# Altium PCB LF-ESP-V2.PcbDoc
Units mm, origin at the board's own origin, x right, y up, seen from the top; angles counter-clockwise.
Board outline 150 x 40.78 mm, 2 copper layers (Top Layer, Bottom Layer); 97 components, 72 nets, 451 pads, 131 vias.
Unrouted connection lines stored in the file: 246.
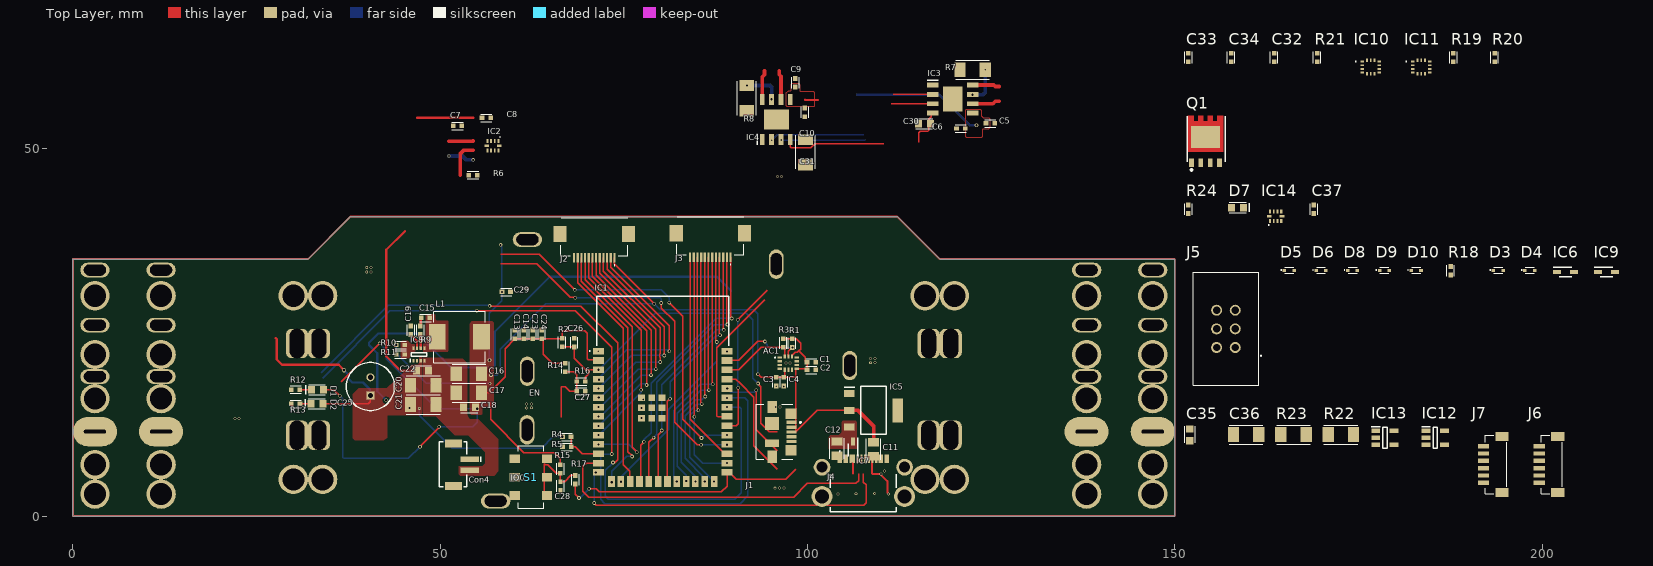
[diagram p0: Top Layer view]
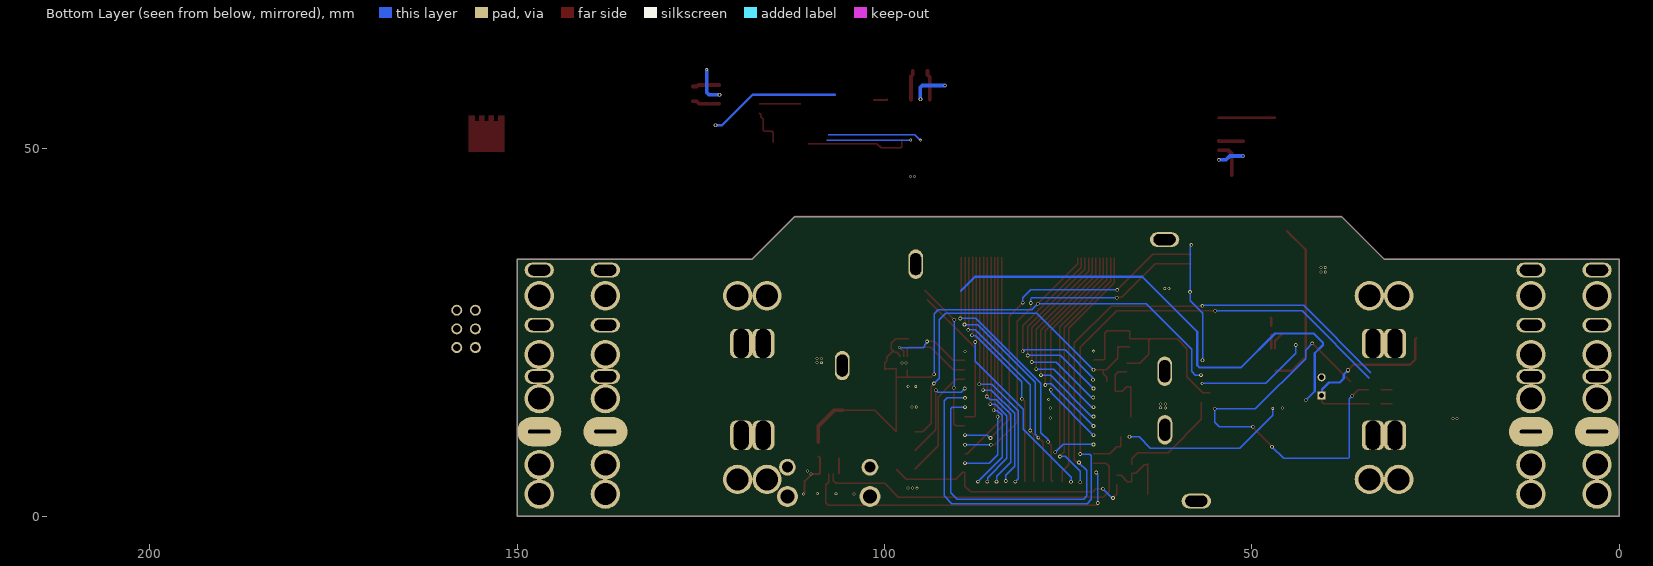
[diagram p1: Bottom Layer view, seen from below]

## Layer stack, top to bottom
Top Solder: solder mask 0.0102, Solder Resist, Dk 3.5
Top Layer: signal copper 0.0356
Dielectric 1: dielectric 0.32, FR-4, Dk 4.8
Bottom Layer: signal copper 0.0356
Bottom Solder: solder mask 0.0102, Solder Resist, Dk 3.5

## Board outline
32,35 37.775,40.775 112.225,40.775 118,35 150,35 150,0 0,0 0,35

## Design rules (kind name [scope] priority, off if disabled: settings)
BoardOutlineClearance [All] p1: gap=0.8 ignorepadtopadclearanceinfootprint=FALSE
Clearance [All] p1: gap=0.127 ignorepadtopadclearanceinfootprint=TRUE except(0.2: Arc-THPad Track-THPad SMDPad-THPad; 0.254: THPad-Fill THPad-Poly THPad-Region Via-Fill Via-Poly Via-Region; 0.33: Arc-Hole Track-Hole SMDPad-Hole THPad-Hole Via-Hole Fill-Hole Poly-Hole Region-Hole; 0.5: THPad-THPad)
HoleSize [All] p1: absolutevalues=TRUE maxlimit=4 minlimit=0.02 maxpercent=80.000 minpercent=20.000
HoleToHoleClearance [All] p1: gap=0.127 allowstackedmicrovias=TRUE
PlaneClearance [All] p1: clearance=0.3
PlaneConnect PlaneConnect_1 [(HasFootprint('R 2512'))] p1: planeconnectstyle=Relief reliefexpansion=0.508 reliefentries=4 reliefconductorwidth=0.254 reliefairgap=0.254
PlaneConnect [All] p2: planeconnectstyle=Relief reliefexpansion=0.508 reliefentries=4 reliefconductorwidth=0.254 reliefairgap=0.254
PolygonConnect "Polygon Power Connection" [(HasFootprint('DFN 5x6')) OR  (HasFootprint('R 2512')) OR  IsVia OR  HasFootprint('SMD PAD')  OR  (HasFootprint('DJNR60454R5FERROCORE'))  OR  (HasFootprint ('SON50P200X200X80-9N-D')) OR (HasFootprint('SOT230P700X180-4N'))  OR    InNetClass('Power')] p1: connectstyle=Direct reliefconductorwidth=0.254 reliefentries=4 polygonreliefangle="90 Angle" airgapwidth=0.254 // Conection to high power components
PolygonConnect [All] p2: connectstyle=Direct reliefconductorwidth=0.254 reliefentries=4 polygonreliefangle="90 Angle" airgapwidth=0.254
RoutingVias [All] p1: holewidth=0.3 width=0.5 viastyle="Through Hole" minholewidth=0.2 minwidth=0.3 maxholewidth=1 maxwidth=1.27
SilkToSilkClearance [All] p1: silktosilkclearance=0.127
SolderMaskExpansion "Tented Vias" [IsVia] p1: expansion=0.102 istentingtop=TRUE
SolderMaskExpansion [All] p2: expansion=0.102 istentingtop=FALSE
Width [All] p1: maxlimit=1 minlimit=0.127 preferedwidth=0.3 minimp=50.000000 maximp=50.000000 favimp=50.000000
25 further rules are at their usual default settings.

## Classes and differential pairs
component class Sensors: AC1 C3 C4 C27 C28 C29 C32 C33 C34 IC10 IC11 R19 R20 R21
component class Interface: C2 C7 C8 D3 D4 D5 D6 D8 D9 D10 IC6 IC7 IC9 J1 J4 J5 R6 R18
component class Power-line: C11 C12 C15 C16 C17 C18 C19 C20 C21 C22 C25 Con4 IC5 IC8 L1 Q1 R1 R3 R9 R10 R11 S1
component class MCU_LF: C1 C13 C14 C23 C24 C26 C37 D1 D2 D7 IC1 IC2 IC14 J2 J3 R2 R4 R5 R12 R13 R14 R15 R16 R17 R24
component class Drivers: C5 C6 C9 C10 C30 C31 C35 C36 IC3 IC4 IC12 IC13 J6 J7 R7 R8 R22 R23

## Components (designator, comment, footprint, x,y, rotation, side; value= is the part's Value field where it differs from the comment)
AC1 "LSM6DSOXTR" LGA-14_1 97.4,20.825 r0 top
C1 "0.1uF" "C 0402" 100.525,20.925 r0 top
C2 "10uF" "C 0402" 100.525,19.9 r0 top
C3 "100nF" "C 0402" 95.75,18.3 r270 top
C4 "100nF" "C 0402" 96.775,18.3 r270 top
C5 "100nF" "C 0402" 124.891,53.475 r0 top
C6 "100nF" "C 0402" 120.875,52.775 r180 top
C7 "10uF" "C 0402" 52.359,53.125 r180 top
C8 "10uF" "C 0402" 56.275,54.225 r0 top
C9 "100nF" "C 0402" 98.35,59 r90 top
C10 "100nF" "C 0402" 99.65,54.973 r270 top
C11 "22uF" "C 0805" 109,9.1 r270 top
C12 "10uF" "C 0805" 104,9.2 r270 top
C13 "1uF" "C 0402" 60.15,24.734 r90 top
C14 "100nF" "C 0402" 61.375,24.734 r90 top
C15 "100nF" "C 0402" 48,27 r0 top
C16 "40uF" "C 1206" 53.9,19.4 r180 top
C17 "40uF" "C 1206" 53.9,16.8 r180 top
C18 "100nF" "C 0603" 54,14.8 r180 top
C19 "33nF" "C 0402" 46,25.3 r90 top
C20 "10uF" "C 1206" 47.7,17.8 r0 top
C21 "10uF" "C 1206" 47.7,15.2 r0 top
C22 "100nF" "C 0603" 47.587,19.8 r0 top
C23 "10uF" "C 0402" 62.6,24.75 r90 top
C24 "22uF" "C 0402" 63.825,24.75 r90 top
C25 "UVY1V101MED1TD" CAPPRD250W50D655H1250 40.5,16.4 r90 top
C26 "1uF" "C 0402" 68.25,23.609 r90 top
C27 "100nF" "C 0402" 69.166,17 r0 top
C28 "1uF" "C 0402" 66.375,4.1 r270 top
C29 "100nF" "C 0402" 58.991,30.525 r0 top
C30 "0.1uF" "C 0603" 115.925,53.425 r180 top
C31 "47uF" "C 1206" 99.725,49.55 r270 top
C32 "100nF" "C 0402" 163.533,62.428 r90 top
C33 "1uF" "C 0402" 151.857,62.428 r90 top
C34 "100nF" "C 0402" 157.683,62.428 r90 top
C35 "0.1uF" "C 0603" 152.057,11.076 r90 top
C36 "47uF" "C 1206" 159.708,11.101 r0 top
C37 "0.1uF" "C 0402" 168.933,41.777 r90 top
Con4 "2Pin Power" B2B-ZR-SM4A-TF 54,7 r90 top
D1 "LED BLUE" "LED 0603 BLUE" 33.275,17.2 r180 top
D2 "LED BLUE" "LED 0603 BLUE" 33.225,15.3 r180 top
D3 "LESD5D5.0CT1G" LESD5D50CT1G 194.034,33.452 r0 top
D4 "LESD5D5.0CT1G" LESD5D50CT1G 198.335,33.452 r0 top
D5 "LESD5D5.0CT1G" LESD5D50CT1G 165.583,33.452 r0 top
D6 "LESD5D5.0CT1G" LESD5D50CT1G 169.908,33.452 r0 top
D7 "LED BLUE" "LED 0603 BLUE" 158.533,42.002 r0 top
D8 "LESD5D5.0CT1G" LESD5D50CT1G 174.209,33.452 r0 top
D9 "LESD5D5.0CT1G" LESD5D50CT1G 178.534,33.452 r0 top
D10 "LESD5D5.0CT1G" LESD5D50CT1G 182.859,33.452 r0 top
IC1 "ESP32-S3-WROOM-1-N16R8" ESP32S3WROOM1N16R8 80.3,17.2 r0 top
IC2 "ADS1115IRUGR" ADS1115IRUGR 57.175,50.425 r180 top
IC3 "DRV8251DDAR" SOIC127P600X170-9N 119.775,56.775 r0 top
IC4 "DRV8251DDAR" SOIC127P600X170-9N 95.75,54 r90 top
IC5 "AMS1117-3.3" SOT229P700X180-4N 109,14.4 r0 top
IC6 "BAT760-7" SOD2513X120N 203.21,33.227 r0 top
IC7 "BAT760-7" SOD2513X120N 106.2,9 r270 top
IC8 "TPS62933DRLR" SOTFL50P160X60-8N 47.1,22 r90 top
IC9 "BAT760-7" SOD2513X120N 208.785,33.227 r0 top
IC10 "BMI323" BMI323 176.684,61.128 r0 top
IC11 "BMI323" BMI323 183.559,61.128 r0 top
IC12 "INA180A2IDBVR" SOT95P280X145-5N 185.459,10.676 r0 top
IC13 "INA180A2IDBVR" SOT95P280X145-5N 178.609,10.676 r0 top
IC14 "ADS1115IRUGR" ADS1115IRUGR 163.733,40.827 r0 top
J1 "0473461001" 0473461001 95.86,11.465 r270 top
J2 "XF3M-1215-1B" XF3M12151B 70.975,37.9 r180 top
J3 "XF3M-1215-1B" XF3M12151B 86.775,38 r180 top
J4 "USB4500-03-0-A" USB4500030A 107.6,3.815 r0 top
J5 "09185066324" 09185066324 158.233,22.951 r90 top
J6 "BM06B-SRSS-TB_LF__SN_" BM06BSRSSTBLFSN 201.185,7.025 r90 top
J7 "BM06B-SRSS-TB_LF__SN_" BM06BSRSSTBLFSN 193.609,7.025 r90 top
L1 "4.7uH" HPI0630 52.6,24.4 r0 top
Q1 "AON6403" "DFN 5x6" 154.183,51.027 r0 top
R1 "100k" "R 0402" 97.9,23.55 r90 top
R2 "10k" "R 0402" 66.6,23.625 r90 top
R3 "1k" "R 0402" 96.7,23.575 r90 top
R4 "47k" "R 0402" 67.225,10.8 r180 top
R5 "13k" "R 0402" 67.234,9.425 r0 top
R6 "10k" "R 0402" 54.475,46.425 r180 top
R7 "0.05R" "R 1206" 122.475,60.775 r0 top
R8 "0.05R" "R 1206" 91.75,56.9 r90 top
R9 "0" "R 0402" 47.3,25.3 r270 top
R10 "31.3K" "R 0402" 44.6,23.3 r0 top
R11 "10K" "R 0402" 44.6,22 r0 top
R12 "160" "R 0402" 30.316,17.225 r0 top
R13 "160" "R 0402" 30.325,15.275 r0 top
R14 "10k" "R 0402" 67.05,20.234 r90 top
R15 "10k" "R 0402" 66.35,6.409 r90 top
R16 "10k" "R 0402" 69.175,18.325 r180 top
R17 "160" "R 0402" 68.4,4.95 r90 top
R18 "10k" "R 0402" 187.559,33.402 r90 top
R19 "0R" "R 0402" 187.934,62.428 r90 top
R20 "0R" "R 0402" 193.534,62.428 r90 top
R21 "0R" "R 0402" 169.383,62.428 r90 top
R22 "0.05R" "R 1206" 172.608,11.101 r0 top
R23 "0.05R" "R 1206" 166.158,11.101 r0 top
R24 "10k" "R 0402" 151.857,41.777 r90 top
S1 "CL-SB-22B-01T" CLSB22B01T 62.35,5.3 r90 top

## Footprints (in the part's own frame and the unit in brackets; to place one, negate y for a bottom-side part, rotate by r counter-clockwise, add the part's x,y. Pads: shape width x height; smd on the part's side, far side on the other; paste and mask are expansions set on the pad)
0473461001 [mm]
  rect 0.45x1.38 smd: 1(-1.3,1.975) 2(-0.65,1.975) 3(0,1.975) 4(0.65,1.975) 5(1.3,1.975)
  rect 1.425x1.55 smd: MP1(-2.487,1.89) MP2(2.487,1.89)
  rect 1.65x1.3 smd: MP3(-3.375,-0.685) MP6(3.375,-0.685)
  rect 1.8x1.9 smd: MP4(-1.15,-0.685)
  rect 1x1.9 smd: MP5(1.55,-0.685)
  silkscreen extent -3.75,-2.84 3.75,3.26, body extent -3.9,-2.5 3.9,2.5, height 2.72
09185066324 [mm]
  round 1.5 hole 1: 1(0,0) 2(0,2.54) 3(2.54,0) 4(2.54,2.54) 5(5.08,0) 6(5.08,2.54)
  silkscreen extent -5.16,-3.55 10.24,5.72, body extent -5.16,-3.21 10.24,5.99, height 9.31
ADS1115IRUGR [mm]
  rect 0.3x0.575 smd: 1(-0.75,-0.638) 4(0.75,-0.638) 6(0.75,0.638) 9(-0.75,0.638)
  rect 0.25x0.575 smd: 2(-0.25,-0.638) 3(0.25,-0.638) 7(0.25,0.638) 8(-0.25,0.638)
  rect 0.63x0.35 smd: 5(0.86,0) 10(-0.86,0)
  silkscreen extent -1,-1.25 -0.9,-1.15, body extent -1,-0.75 1,0.75, height 0.4
B2B-ZR-SM4A-TF [mm] "JST ZH Top entry 1.5mm"
  rect 1.1x2.3 smd mask+0.1: 0(-2.9,2.2) 0(2.9,2.2)
  rect 0.7x2.5 smd mask+0.1: 1(0.75,0) 2(-0.75,0)
  silkscreen extent -3,-1.5 3.1,4.1, body extent -2.95,-1.15 3.05,4.05, height 5
BM06BSRSSTBLFSN [mm]
  rect 0.6x1.55 smd: 1(-2.5,1.588) 2(-1.5,1.588) 3(-0.5,1.588) 4(0.5,1.588) 5(1.5,1.588) 6(2.5,1.588)
  rect 1.2x1.8 smd: 7(-3.8,-0.937) 8(3.8,-0.937)
  silkscreen extent -4,-1.59 4,1.31, body extent -4,-1.54 4,2.06, height 4.3
BMI323 [mm]
  rect 0.475x0.25 smd: 1(-1.163,0.75) 2(-1.163,0.25) 3(-1.163,-0.25) 4(-1.163,-0.75) 8(1.163,-0.75) 9(1.163,-0.25) 10(1.163,0.25) 11(1.163,0.75)
  rect 0.25x0.475 smd: 5(-0.5,-0.913) 6(0,-0.913) 7(0.5,-0.913) 12(0.5,0.913) 13(0,0.913) 14(-0.5,0.913)
  silkscreen extent -2.1,0.7 -2,0.8, body extent -1.5,-1.25 1.5,1.25, height 0.84
"C 0402" [mm] "MLCC Capacitor 0402"
  rect 0.635x0.6 smd: 1(-0.584,0) 2(0.584,0)
  silkscreen extent -0.76,-0.51 0.76,0.51, body extent -0.76,-0.25 0.74,0.25, height 0.35
"C 0603" [mil]
  rect 38x39.37 smd: 1(-32,0) 2(32,0)
  silkscreen extent -43,-28 47,28, body extent -31,-16 31,16, height 24
"C 0805" [mil]
  rect 45x59.06 smd: 1(-38,0) 2(38,0)
  silkscreen extent -55,-39 55,39, body extent -39,-25 39,25, height 49
"C 1206" [mil]
  rect 60x78.74 smd: 1(-68,0) 2(68,0)
  silkscreen extent -91,-51 89,51, body extent -63,-31 63,31, height 59
CAPPRD250W50D655H1250 [mm]
  rect 1.1x1.1 hole 0.7: 1(0,0)
  round 1.1 hole 0.7: 2(2.5,0)
  silkscreen extent -2.02,-3.27 4.52,3.27, body extent -2.15,-3.4 4.65,3.4, height 12.5
CLSB22B01T [mm]
  rect 1.2x1.4 smd: 1(-2.5,-2.2) 2(0,-2.2) 3(2.5,-2.2) 4(-2.5,2.2) 5(0,2.2) 6(2.5,2.2)
  silkscreen extent -4.25,-1.75 4.25,1.75, body extent -4.25,-2.78 4.25,2.78, height 5.6
"DFN 5x6" [mm]
  rect 0.65x1.2 smd: 1(-1.905,-2.91) 2(-0.635,-2.91) 3(0.635,-2.91) 4(1.905,-2.91)
  rect 4x3 smd: 5_8(0,0.6)
  Top Layer region: -2.4,-1.4 -2.4,3.5 -1.6,3.5 -1.6,2.7 -1,2.7 -1,3.5 -0.3,3.5 -0.3,2.7 0.3,2.7 0.3,3.5 1,3.5 1,2.7 1.6,2.7 1.6,3.5 2.4,3.5 2.4,-1.4
  silkscreen extent -2.5,-4.02 2.7,3.42, body extent -2.5,-3.27 2.5,3.26, height 1.2
ESP32S3WROOM1N16R8 [mm]
  rect 1.5x0.9 smd: 1(-8.75,5.26) 2(-8.75,3.99) 3(-8.75,2.72) 4(-8.75,1.45) 5(-8.75,0.18) 6(-8.75,-1.09) 7(-8.75,-2.36) 8(-8.75,-3.63) 9(-8.75,-4.9) 10(-8.75,-6.17) 11(-8.75,-7.44) 12(-8.75,-8.71) 13(-8.75,-9.98) 14(-8.75,-11.25) 27(8.75,-11.25) 28(8.75,-9.98) 29(8.75,-8.71) 30(8.75,-7.44) 31(8.75,-6.17) 32(8.75,-4.9) 33(8.75,-3.63) 34(8.75,-2.36) 35(8.75,-1.09) 36(8.75,0.18) 37(8.75,1.45) 38(8.75,2.72) 39(8.75,3.99) 40(8.75,5.26)
  rect 0.9x1.5 smd: 15(-6.985,-12.5) 16(-5.715,-12.5) 17(-4.445,-12.5) 18(-3.175,-12.5) 19(-1.905,-12.5) 20(-0.635,-12.5) 21(0.635,-12.5) 22(1.905,-12.5) 23(3.175,-12.5) 24(4.445,-12.5) 25(5.715,-12.5) 26(6.985,-12.5)
  rect 0.9x0.9 smd: 41(-1.5,-2.46) 42(-2.9,-1.06) 43(-2.9,-2.46) 44(-2.9,-3.86) 45(-1.5,-3.86) 46(-0.1,-3.86) 47(-0.1,-2.46) 48(-0.1,-1.06) 49(-1.5,-1.06)
  silkscreen extent -10,5.21 9,12.75, body extent -9,0 9,3.25, height 12.75
HPI0630 [mm] "Power Inductor"
  rect 2.3x3.5 smd: 1(-3,0) 2(3,0)
  silkscreen extent -3.5,-3.5 3.5,3.5, body extent -3.65,-3.35 3.65,3.35, height 2.81
"LED 0603 BLUE" [mil]
  rect 38x39.37 smd: 1(-32,0) 2(32,0)
  silkscreen extent -43,-28 63,28, body extent -31,-16 31,16, height 22
LESD5D50CT1G [mm]
  rect 0.48x0.4 smd: 1(-0.66,0) 2(0.66,0)
  silkscreen extent -1.15,-0.4 0.6,0.4, body extent -0.8,-0.4 0.8,0.4, height 0.6
LGA-14_1 [mm]
  rect 0.6x0.3 smd: 1(-1.15,0.75) 2(-1.15,0.25) 3(-1.15,-0.25) 4(-1.15,-0.75) 8(1.15,-0.75) 9(1.15,-0.25) 10(1.15,0.25) 11(1.15,0.75)
  rect 0.3x0.6 smd: 5(-0.5,-0.9) 6(0,-0.9) 7(0.5,-0.9) 12(0.5,0.9) 13(0,0.9) 14(-0.5,0.9)
  silkscreen extent -1.83,0.74 -1.8,0.77, body extent -1.62,-1.25 1.38,1.25, height 0.86
"R 0402" [mm] "0402 resistor Chip"
  rect 0.635x0.6 smd: 1(-0.584,0) 2(0.584,0)
  silkscreen extent -0.76,-0.51 0.76,0.51, body extent -0.5,-0.25 0.5,0.25, height 0.31
"R 1206" [mil]
  rect 60x78.74 smd: 1(-68,0) 2(68,0)
  silkscreen extent -91,-51 89,51, body extent -75,-32 75,31, height 24
SOD2513X120N [mm]
  rect 1.075x0.5 smd: 1(-1.162,0) 2(1.162,0)
  silkscreen extent -1.7,-0.65 0.85,0.65, body extent -1.25,-0.65 1.25,0.65, height 1.2
SOIC127P600X170-9N [mm]
  rect 1.525x0.65 smd: 1(-2.712,1.905) 2(-2.712,0.635) 3(-2.712,-0.635) 4(-2.712,-1.905) 5(2.712,-1.905) 6(2.712,-0.635) 7(2.712,0.635) 8(2.712,1.905)
  rect 2.71x3.4 smd: 9(0,0)
  silkscreen extent -3.47,2.58 -1.95,2.58, body extent -3,-2.45 3,2.45, height 1.7
SOT95P280X145-5N [mm]
  rect 1.2x0.6 smd: 1(-1.25,0.95) 2(-1.25,0) 3(-1.25,-0.95) 4(1.25,-0.95) 5(1.25,0.95)
  silkscreen extent -1.85,-1.45 0.3,1.5, body extent -1.4,-1.45 1.4,1.45, height 1.2
SOT229P700X180-4N [mm]
  rect 1.45x0.95 smd: 1(-3.3,2.29) 2(-3.3,0) 3(-3.3,-2.29)
  rect 1.45x3.25 smd: 4(3.3,0)
  silkscreen extent -4.03,-3.25 1.75,3.25, body extent -3.35,-3.15 3.35,3.15, height 1.8
SOTFL50P160X60-8N [mm]
  rect 0.475x0.3 smd: 1(-0.838,0.75) 2(-0.838,0.25) 3(-0.838,-0.25) 4(-0.838,-0.75) 5(0.838,-0.75) 6(0.838,-0.25) 7(0.838,0.25) 8(0.838,0.75)
  silkscreen extent -1.07,-1.05 0.25,1.15, body extent -0.8,-1.02 0.8,1.08, height 0.6
USB4500030A [mm]
  rect 0.6x1.1 smd: A1(-3.2,4) A4(-2.4,4) A9(2.4,4) A12(3.2,4)
  rect 0.3x1.1 smd: A5(-1.25,4) A6(-0.25,4) A7(0.25,4) A8(1.25,4) B5(1.75,4) B6(0.75,4) B7(-0.75,4) B8(-1.75,4)
  round 2.28 hole 1.52: MH1(-5.62,2.85) MH2(5.62,2.85)
  round 2.85 hole 1.9: MH3(-5.62,-1.15) MH4(5.62,-1.15)
  silkscreen extent -4.47,-3.25 4.47,5.07, body extent -5.78,-2.95 5.78,4.25, height 2.36
XF3M12151B [mm]
  rect 0.3x1.3 smd: 1(-2.75,2.75) 2(-2.25,2.75) 3(-1.75,2.75) 4(-1.25,2.75) 5(-0.75,2.75) 6(-0.25,2.75) 7(0.25,2.75) 8(0.75,2.75) 9(1.25,2.75) 10(1.75,2.75) 11(2.25,2.75) 12(2.75,2.75)
  rect 1.8x2.2 smd: MP1(-4.65,-0.5) MP2(4.65,-0.5)
  silkscreen extent -4.55,-2.75 4.55,3.8, body extent -5.05,-2.77 5.05,3.63, height 2

## Part data
AC1: "Accelerometer", Manufacturer_Name=STMicroelectronics, Mouser Part Number=511-LSM6DSOXTR, Arrow Part Number=LSM6DSOXTR, Arrow Price/Stock=https://www.arrow.com/en/products/lsm6dsoxtr/stmicroelectronics?region=europe, Datasheet Link=https://www.st.com/resource/en/datasheet/lsm6dsox.pdf, Manufacturer_Part_Number=LSM6DSOXTR, Mouser Price/Stock=https://www.mouser.co.uk/ProductDetail/STMicroelectronics/LSM6DSOXTR?qs=l7cgNqFNU1i9dcjzItLpVQ%3D%3D
C1 C2 C3 C4 C5 C6 C7 C8 C9 C10 C11 C12 C13 C14 C15 C16 C17 C18 C19 C20 C21 C22 C23 C24 C26 C27 C28 C29 C30 C31 C32 C33 C34 C35 C36 C37: library part Capacitor, "MLCC Capacitor"
C25: "Capacitor Polarised", Manufacturer_Name=Nichicon, Arrow Part Number=UVY1V101MED1TD, Arrow Price/Stock=https://www.arrow.com/en/products/uvy1v101med1td/nichicon, Datasheet Link=http://nichicon-us.com/english/products/pdfs/e-uvy.pdf, Height=12.5mm, Manufacturer_Part_Number=UVY1V101MED1TD
D3 D4 D5 D6 D8 D9 D10: "TVS Diode (Bi-directional)", Manufacturer_Name=LRC, Height=0.7mm, Manufacturer_Part_Number=LESD5D5.0CT1G
IC1: "Integrated Circuit", Manufacturer_Name="Espressif Systems", Mouser Part Number=356-ESP32S3WRM1N16R8, Datasheet Link=https://www.espressif.com/sites/default/files/documentation/esp32-s3-wroom-1_wroom-1u_datasheet_en.pdf, Height=3.25mm, Manufacturer_Part_Number=ESP32-S3-WROOM-1-N16R8, Mouser Price/Stock=https://www.mouser.co.uk/ProductDetail/Espressif-Systems/ESP32-S3-WROOM-1-N16R8?qs=Li%252BoUPsLEnvQc9gW6AMhZg%3D%3D
IC2 IC14: "Integrated Circuit", Manufacturer_Name="Texas Instruments", Mouser Part Number=595-ADS1115IRUGR, Arrow Part Number=ADS1115IRUGR, Arrow Price/Stock=https://www.arrow.com/en/products/ads1115irugr/texas-instruments?region=nac, Datasheet Link=https://www.ti.com/lit/ds/symlink/ads1115.pdf?ts=1601235703022&ref_url=https%253A%252F%252Fwww.ti.com%252Fproduct%252FADS1115%253FkeyMatch%253DADS1115IRUGR%2526tisearch%253DSearch-EN-everything%2526usecase%253DOPN, Height=0.4mm, Manufacturer_Part_Number=ADS1115IRUGR, Mouser Price/Stock=https://www.mouser.co.uk/ProductDetail/Texas-Instruments/ADS1115IRUGR?qs=IK5e5L0zOXhqw%2F8AHSSbuA%3D%3D
IC3 IC4: "Integrated Circuit", Manufacturer_Name="Texas Instruments", Mouser Part Number=595-DRV8251DDAR, Arrow Part Number=DRV8251DDAR, Arrow Price/Stock=https://www.arrow.com/en/products/drv8251ddar/texas-instruments?region=nac, Datasheet Link=https://www.arrow.com/en/products/drv8251ddar/texas-instruments?region=nac, Height=1.7mm, Manufacturer_Part_Number=DRV8251DDAR, Mouser Price/Stock=https://www.mouser.co.uk/ProductDetail/Texas-Instruments/DRV8251DDAR?qs=doiCPypUmgHTzZyfapGahQ%3D%3D
IC5: "Integrated Circuit", Manufacturer_Name=Advanced, Datasheet Link=https://datasheet.datasheetarchive.com/originals/distributors/Datasheets-28/DSA-550594.pdf, Height=1.8mm, Manufacturer_Part_Number=AMS1117-3.3
IC6 IC7 IC9: "Integrated Circuit", Manufacturer_Name="Lattice Semiconductor", Mouser Part Number=N/A, Datasheet Link=https://www.diodes.com/assets/Datasheets/ds30498.pdf, Height=1.2mm, Manufacturer_Part_Number=BAT760-7, Mouser Price/Stock=https://www.mouser.com/Search/Refine.aspx?Keyword=N%2FA
IC8: "Integrated Circuit", Manufacturer_Name="Texas Instruments", Mouser Part Number=595-TPS62933DRLR, Arrow Part Number=TPS62933DRLR, Arrow Price/Stock=https://www.arrow.com/en/products/tps62933drlr/texas-instruments?utm_currency=USD&region=nac, Datasheet Link=https://www.ti.com/lit/ds/symlink/tps62933.pdf?ts=1626073394234, Height=0.6mm, Manufacturer_Part_Number=TPS62933DRLR, Mouser Price/Stock=https://www.mouser.co.uk/ProductDetail/Texas-Instruments/TPS62933DRLR?qs=Rp5uXu7WBW9fv47wfQVntQ%3D%3D
IC10 IC11: "Integrated Circuit", Manufacturer_Name=BOSCH, Mouser Part Number=262-BMI323, Arrow Part Number=BMI323, Arrow Price/Stock=https://www.arrow.com/en/products/bmi323/bosch?utm_currency=USD&region=nac, Datasheet Link=https://www.bosch-sensortec.com/media/boschsensortec/downloads/datasheets/bst-bmi323-ds000.pdf, Height=0.87mm, Manufacturer_Part_Number=BMI323, Mouser Price/Stock=https://www.mouser.co.uk/ProductDetail/Bosch-Sensortec/BMI323?qs=By6Nw2ByBD3%2FE1v0UqNQPQ%3D%3D
IC12 IC13: "Integrated Circuit", Manufacturer_Name="Texas Instruments", Mouser Part Number=595-INA180A2IDBVR, Arrow Part Number=INA180A2IDBVR, Arrow Price/Stock=https://www.arrow.com/en/products/ina180a2idbvr/texas-instruments?utm_currency=USD&region=nac, Datasheet Link=http://www.ti.com/lit/ds/symlink/ina180.pdf, Height=1.45mm, Manufacturer_Part_Number=INA180A2IDBVR, Mouser Price/Stock=https://www.mouser.co.uk/ProductDetail/Texas-Instruments/INA180A2IDBVR?qs=5aG0NVq1C4wYcJfa99BoHg%3D%3D
J1: "Connector", Manufacturer_Name=Molex, Mouser Part Number=N/A, Arrow Part Number=0473461001, Arrow Price/Stock=https://www.arrow.com/en/products/0473461001/molex?region=nac, Datasheet Link=https://componentsearchengine.com/Datasheets/1/0473461001.pdf, Height=2.45mm, Manufacturer_Part_Number=0473461001, Mouser Price/Stock=https://www.mouser.co.uk/ProductDetail/Molex/0473461001?qs=2bnkQPT%252BPafTZgGVt%2FOGfA%3D%3D
J2 J3: "Connector", Manufacturer_Name="Omron Electronics", Mouser Part Number=653-XF3M-1215-1B, Arrow Part Number=XF3M-1215-1B, Arrow Price/Stock=https://www.arrow.com/en/products/xf3m-1215-1b/omron, Datasheet Link=https://datasheet.lcsc.com/szlcsc/Omron-Electronics-XF3M-1215-1B_C231431.pdf, Height=2mm, Manufacturer_Part_Number=XF3M-1215-1B, Mouser Price/Stock=https://www.mouser.co.uk/ProductDetail/Omron-Electronics/XF3M-1215-1B?qs=1He0yLMpldAQYeSJcjbchQ%3D%3D
J4: "Connector", Manufacturer_Name="GCT (GLOBAL CONNECTOR TECHNOLOGY)", Mouser Part Number=640-USB4500030A, Datasheet Link=https://componentsearchengine.com/Datasheets/2/USB4500-03-0-A.pdf, Manufacturer_Part_Number=USB4500-03-0-A, Mouser Price/Stock=https://www.mouser.co.uk/ProductDetail/GCT/USB4500-03-0-A?qs=7D1LtPJG0i2mVyw7UtV%2FkQ%3D%3D
J5: "Connector", Manufacturer_Name=HARTING, Mouser Part Number=617-09185066324, Arrow Part Number=09185066324, Arrow Price/Stock=https://www.arrow.com/en/products/09185066324/harting?utm_currency=USD&region=europe, Datasheet Link=https://b2b.harting.com/files/download/PRD/PDF_DS/PDF_DS_09185066324_EN.pdf, Manufacturer_Part_Number=09185066324, Mouser Price/Stock=https://www.mouser.co.uk/ProductDetail/HARTING/09185066324?qs=qa49y27LPCE%2F3ZplMsKEeQ%3D%3D
J6 J7: "Connector", Arrow Part Number=BM06B-SRSS-TB(LF)(SN), Manufacturer_Name="JST (JAPAN SOLDERLESS TERMINALS)", Mouser Part Number=N/A, Arrow Price/Stock=https://www.arrow.com/en/products/bm06b-srss-tb-lf-sn/jst-manufacturing?region=europe, Datasheet Link=http://www.jst-mfg.com/product/pdf/eng/eSR.pdf, Height=4.25mm, Manufacturer_Part_Number=BM06B-SRSS-TB(LF)(SN), Mouser Price/Stock=https://www.mouser.co.uk/ProductDetail/JST-Commercial/BM06B-SRSS-TBLFSN?qs=IKkN%2F947nfAcbKIXx%2F1kIg%3D%3D
L1: library part Inductor, "General pourpouse inductor"
Q1: "P-Mosfet 30V 67A Rds(on) 3.1mR"
R1 R2 R3 R4 R5 R6 R7 R8 R9 R10 R11 R12 R13 R14 R15 R16 R17 R18 R19 R20 R21 R22 R23 R24: library part Resistor, "General pourpouse resistor"
S1: "Switch", Manufacturer_Name="Nidec Copal", Mouser Part Number=229-CL-SB-22B-01T, Datasheet Link=https://www.nidec-copal-electronics.com/e/catalog/switch/cl-sb.pdf, Height=5.5mm, Manufacturer_Part_Number=CL-SB-22B-01T, Mouser Price/Stock=https://www.mouser.co.uk/ProductDetail/Nidec-Components/CL-SB-22B-01T?qs=XeJtXLiO41T0x7ZRpBUZfA%3D%3D

## Free pads (board coordinates)
  round 4 hole 3: 5(30,5) 6(30,30) 7(34,30) 8(34,5) 9(120,30) 10(120,5) 11(116,30) 12(116,5) 13(3,3) 14(12,3) 15(12,16) 16(3,16) 17(3,22) 18(12,22) 19(3,7) 20(12,7) 21(147,3) 22(138,3) 23(147,7) 24(138,7) 25(138,16) 26(147,16) 27(138,22) 28(147,22) 53(12,30) 54(3,30) 55(138,30) 56(147,30)
  oval 4x2 hole 1.5 slot 3 at 0 deg: 32(3,33.5) 57(12,33.5) 59(3,26) 60(12,26) 61(12,19) 62(3,19) 63(138,33.5) 64(147,33.5) 65(138,26) 66(147,26) 67(138,19) 68(147,19) 72(57.55,2.05) 73(61.875,37.65)
  oval 6x4 hole 0.5 slot 3 at 0 deg: 41(12,11.5) 42(3,11.5) 43(138,11.5) 44(147,11.5)
  rrect50% 3x4 hole 2 slot 4 at 90 deg: 45(30.5,11) 46(33.5,11) 47(116.5,11) 48(119.5,11) 49(30.5,23.5) 50(33.5,23.5) 51(116.5,23.5) 52(119.5,23.5)
  oval 2x4 hole 1.5 slot 3 at 90 deg: 69(61.85,19.725) 70(105.75,20.5) 71(61.825,11.75) 75(95.75,34.3)

## Via types
v1: diameter 0.5, hole 0.3, Top Layer to Bottom Layer, tented both sides, 83 vias
v2: diameter 0.4, hole 0.25, Top Layer to Bottom Layer, tented both sides, 47 vias
v3: diameter 0.6, hole 0.4, Top Layer to Bottom Layer, tented both sides, 1 vias

## Nets (pads, with @x,y where several pads share a name; then routed paths per layer and width w, separated by ;. In a path a pad name is that pad's centre, name@x,y a point inside that pad or via, vN(x,y) a via of type N, cw(c..) or ccw(c..) an arc to the next point about the centre after c; other vN are vias at no path point)
3.3V: AC1.5 AC1.8 C1.1 C3.2 C4.2 C5.1 C6.1 C9.1 C10.1 C11.1 C13.1 C14.1 C16.1 C17.1 C18.1 C23.1 C24.1 C27.1 C28.1 C29.1 C32.1 C33.1 C34.1 C37.1 D1.1 IC1.2 IC2.8 IC3.4 IC4.4 IC5.2 IC10.5 IC10.8 IC11.5 IC11.8 IC12.5 IC13.5 IC14.8 J2.1 J5.2 J6.3 J7.3 L1.2 R2.2 R10.1 R14.2 R15.2 R16.2 R19.2 R20.2 R21.2 R24.2 | length 256
  Top Layer w0.2: D1.1 35.525,17.2 v1(36.325,16.4) ; 36.5,18.275 41.742,23.517 v1(41.758,23.517) ; R10.1@43.878,23.425 v1(44.018,23.285) ; v1(47.25,9.45) 47.25,9.512 49.85,12.112 v1(49.85,12.175) ; C17.1 56.675,16.8 58.825,18.95 58.825,22.808 60.15,24.133 C13.1 C14.1 62.584,24.15 C23.1 C24.1 ; 56.875,15.5 56.875,13.175 61.4,8.65 65.525,8.65 66.35,7.825 R15.2 ; v1(58.225,36.925) 58.237,36.913 v1@58.237,36.905 ; R14.2 65.257,20.818 64.025,22.05 64.025,23.966 C24.1 ; IC1.2 71.44,21.3 70.167,21.3 70.05,21.417 70.05,24.875 69.675,25.25 66.717,25.25 66.6,25.133 R2.2 66.557,24.166 C24.1 ; J2.1 73.725,34.325 v1(79.125,28.925) ; v1(93.25,19.325) 93.691,18.884 95.75,18.884 96.775,18.884 ; 96.7,24.159 96.725,24.134 97.9,24.134 ; AC1.5 96.9,19.009 96.775,18.884 ; IC4.4 97.655,50.251 97.772,50.134 99.725,50.134 99.734,50.125 100.475,50.125 101.025,50.675 110.35,50.675 ; 97.9,21.725 97.9,21.875 98.3,22.275 98.6,22.275 98.838,22.513 ; 97.95,24.202 97.9,24.152 97.9,24.134 ; IC5.2@105.707,14.393 101.328,14.393 98.4,11.465 98.4,18.875 ; 115.125,50.877 115.125,52.175 115.325,52.375 116.392,52.375 116.509,52.492 116.509,53.998 116.874,54.362 116.874,54.681 IC3.4 ; 96.775,18.884 98.391,18.884 98.4,18.875 ; 97.9,24.134 98.491,24.134 99.075,23.55 99.075,22.75 98.838,22.513 ; 98.4,18.875 98.4,20.025 98.45,20.075 AC1.8 99.766,20.075 99.941,19.9 C1.1 99.923,20.925 99.723,21.125 99.723,21.627 98.838,22.513
  Top Layer w0.5: IC5.2@105.707,14.393 106.882,14.393 109,12.275 C11.1
  Bottom Layer w0.2: v1(36.325,16.4) 36.725,16 36.725,7.967 36.842,7.85 45.65,7.85 v1(47.25,9.45) ; v1(41.758,23.517) 42.675,22.6 42.675,21.45 49.5,14.625 v1(55.05,14.625) 55.05,12.8 54.425,12.175 v1(49.85,12.175) ; v1(44.018,23.285) 44.018,22.157 48.1,18.075 v2(56.75,18.075) ; v1(56.7,21.225) 56.7,27.6 58.407,29.307 v1(58.407,30.525) 58.407,36.662 58.225,36.844 v1(58.225,36.925) ; v1(56.925,19.2) 57.7,19.2 58.2,19.7 58.2,22.725 64.4,28.925 v1(79.125,28.925) 79.94,28.11 92.69,28.11 93.25,27.55 v1(93.25,19.325)
  other v2: 96.775,17.65 95.75,17.675
5V: C2.1 C7.1 C8.1 C12.1 D7.1 IC5.3 IC6.1 IC7.1 IC9.1
12V: C20.1 C21.1 C22.1 C25.1 C30.1 C31.1 C35.1 C36.1 D2.1 IC3.5 IC4.5 IC8.3 Q1.5_8 R4.2 | length 81.5
  Top Layer w0.2: D2.1@34.038,15.317 40.217,15.317 40.5,15.6 C25.1
  Top Layer w0.3: 27.574,24.25 27.75,24.074 27.75,21.325 28.475,20.6 36.175,20.6 v3(36.9,19.875) ; 45.2,38.8 42.65,36.25 42.65,21.75 44.6,19.8 C22.1 ; 46.85,54.225 54.548,54.225 ; 99.65,56.7 99.7,56.65 101.424,56.65
  Bottom Layer w0.2: C25.1@40.4,16.4 C25.1 ; v2(47.15,14.675) 47.15,13.75 51.65,9.25 63.8,9.25 65.35,10.8 v1(66.641,10.8)
  Bottom Layer w0.3: v3(36.9,19.875) 37.482,19.293 37.482,18.743 38.025,18.2 39.5,18.2 40.45,17.25 40.45,16.45 C25.1
  other v2: 45.84,14.733
ADC1: IC1.4 J2.2 | length 27.5
  Top Layer w0.2: J2.2 73.225,33.875 81.2,25.9 v1(81.2,22.45)
  Bottom Layer w0.2: v1(71.607,18.567) 71.665,18.625 71.665,18.865 75.425,22.625 80.944,22.625 81.119,22.45 v1(81.2,22.45)
ADC2: IC1.5 J2.3 | length 27.3
  Top Layer w0.2: J2.3 72.725,33.587 80.5,25.812 80.5,21.875 v1(80.5,21.87)
  Bottom Layer w0.2: v1(71.55,17.38) 76.045,21.875 80.5,21.875 v1(80.5,21.87)
ADC3: IC1.6 J2.4 | length 27.8
  Top Layer w0.2: J2.4 72.225,33.312 79.925,25.612 79.925,22.12 79.92,22.115 79.92,21.635 79.925,21.63 79.925,21 v1(79.95,20.975)
  Bottom Layer w0.2: v1(71.575,16.15) 71.632,16.207 71.857,16.207 76.625,20.975 v1(79.95,20.975)
ADC4: IC1.7 J2.5 | length 28.2
  Top Layer w0.2: J2.5 71.725,33.062 79.325,25.462 79.325,20.033 v1(79.341,20.017)
  Bottom Layer w0.2: v1(71.55,14.84) 71.606,14.896 71.871,14.896 76.992,20.017 v1(79.341,20.017)
ADC5: IC1.8 J2.6 | length 28.5
  Top Layer w0.2: J2.6 71.225,32.812 78.7,25.337 v1(78.7,19.2)
  Bottom Layer w0.2: v1(71.55,13.57) 71.607,13.627 71.827,13.627 77.4,19.2 v1(78.7,19.2)
ADC6: IC1.9 J2.7 | length 29.3
  Top Layer w0.2: J2.7 70.725,32.625 78.1,25.25 v1(78.1,17.85)
  Bottom Layer w0.2: v1(71.55,12.275) 71.575,12.275 77.3,18 77.869,18 78.019,17.85 v1(78.1,17.85)
ADC7: IC1.10 J2.8 | length 29.5
  Top Layer w0.2: J2.8 70.225,32.437 77.335,25.328 77.335,17.225 v1(77.352,17.208)
  Bottom Layer w0.2: v1@71.551,11.031 77.351,16.831 77.351,17.207 v1(77.352,17.208)
  other v1: 71.55,11.03
ADC8: IC1.11 J2.9 | length 35
  Top Layer w0.2: J2.9 69.725,32.2 76.15,25.775 76.15,9.352 76.745,8.757 v1(76.745,8.685)
  Bottom Layer w0.2: v1(71.55,9.76) 75.67,9.76 v1(76.745,8.685)
ADC9: IC1.15 J2.10 | length 35
  Top Layer w0.2: J2.10 69.225,32 75.55,25.675 75.55,8.781 76.125,8.206 v1(76.125,8.125)
  Bottom Layer w0.2: v1(73.339,4.621) 73.339,6.089 75.375,8.125 v1(76.125,8.125)
ADC10: IC1.17 J2.11 | length 33.4
  Top Layer w0.2: J2.11 68.725,31.775 74.925,25.575 74.925,7 75.792,6.133 75.792,4.763 IC1.17
ADC11: IC1.18 J3.1 | length 37.1
  Top Layer w0.2: IC1.18 77.325,4.9 77.325,9.644 77.725,10.044 v1(77.725,10.125) ; J3.1 89.525,27.071 v1(89.687,26.909)
  Bottom Layer w0.2: v1(77.725,10.125) 77.725,10.375 78.7,11.35 78.7,18.1 87.555,26.955 89.641,26.955 v1(89.687,26.909)
ADC12: IC1.19 J3.2 | length 36.1
  Top Layer w0.2: IC1.19 78.395,10.034 v1(79.05,10.69) ; J3.2 89.025,26.231 89.1,26.156 v1(89.1,26.075)
  Bottom Layer w0.2: v1(79.05,10.69) 79.475,11.114 79.475,18.225 87.325,26.075 v1(89.1,26.075)
ADC13: IC1.20 J3.3 | length 34.9
  Top Layer w0.2: IC1.20 79.665,11.084 80.15,11.569 v1(80.15,11.65) ; J3.3 88.52,35.245 88.52,25.511 88.6,25.431 v1(88.6,25.35)
  Bottom Layer w0.2: v1(80.15,11.65) 80.15,17.875 87.625,25.35 v1(88.6,25.35)
ADC14: IC1.21 J3.4 | length 33.9
  Top Layer w0.2: IC1.21 80.935,15.61 v1(81.3,15.975) ; J3.4 88.02,35.245 88.02,24.791 88.105,24.706 v1(88.105,24.625)
  Bottom Layer w0.2: v1(81.3,15.975) 81.3,18.325 87.555,24.58 88.06,24.58 v1(88.105,24.625)
ADC15: IC1.12 J3.5
Battery: IC2.4 R4.1 R5.2 | length 5.5
  Top Layer w0.2: R4.1 67.809,9.434 R5.2 68.375,9.425 69.31,8.49 71.55,8.49
EN: C26.1 IC1.3 J5.1 R2.1 | length 50.8
  Top Layer w0.2: R2.1 68.234,23.041 C26.1 68.25,21.462 69.675,20.037 69.792,19.92 70.2,19.92 ; 69.759,18.325 69.759,18.909 70.2,19.35 70.2,19.92 ; v1(71.55,19.92) 70.2,19.92 ; v1(93.275,18.05) 93.275,17.969 93.605,17.639 93.605,12.622 94.762,11.465 95.86,11.465
  Bottom Layer w0.2: v1(71.55,19.92) 79.28,27.65 91.65,27.65 92.55,26.75 92.55,18.775 v1(93.275,18.05)
GND: AC1.6 AC1.7 C1.2 C2.2 C3.1 C4.1 C5.2 C6.2 C7.2 C8.2 C9.2 C10.2 C11.2 C12.2 C13.2 C14.2 C16.2 C17.2 C18.2 C19.2 C20.2 C21.2 C22.2 C23.2 C24.2 C25.2 C26.2 C27.2 C28.2 C29.2 C30.2 C31.2 C32.2 C33.2 C34.2 C35.2 C36.2 C37.2 Con4.2 D3.1 D4.1 D5.1 D6.1 D8.1 D9.1 D10.1 IC1.1 IC1.40 IC1.41 IC1.42 IC1.43 IC1.44 IC1.45 IC1.46 IC1.47 IC1.48 IC1.49 IC2.1 IC2.3 IC3.1 IC3.9 IC4.1 IC4.9 IC5.1 IC8.4 IC10.6 IC10.7 IC11.6 IC11.7 IC12.2 IC12.4 IC13.2 IC13.4 IC14.1 IC14.3 J1.5 J1.MP1 J1.MP2 J1.MP3 J1.MP4 J1.MP5 J1.MP6 J2.12 J4.A1 J4.A12 J4.MH1 J4.MH2 J4.MH3 J4.MH4 J5.4 J6.6 J7.6 R3.1 R5.1 R6.1 R11.1 R12.1 R13.1 R17.1 R18.1 R22.2 R23.2 | length 6.6
  Top Layer w0.3: C11.2 108.8,7.935 108.8,5.79 108.875,5.715 109.977,5.715 109.987,5.705 109.987,5.642 110.875,4.754 v2@110.875,3.13
  other v2: 111,3 104.175,3.025 95.575,3.8 96.2,3.825 96.8,3.825 110.025,5.725 22.075,13.3 22.625,13.3 77.4,13.34 61.775,14.725 77.4,14.74 62.425,14.75 95.675,14.85 96.25,14.85 61.75,15.275 62.425,15.275 77.65,15.875 97.075,20.825 97.625,20.825 108.605,20.883 109.175,20.9 108.6,21.475 109.2,21.475 89.05,22.4 71.525,22.45 61.3,30.975 61.85,30.975 40,33.25 40.575,33.25 40.573,33.827 40,33.85 95.925,46.25 96.475,46.25
GPIO1: IC2.5 J3.6 | length 36
  Top Layer w0.2: 87.525,35.25 87.525,23.899 87.642,23.781 v1(87.642,23.713)
  Bottom Layer w0.2: v1(74.601,4.686) 74.601,5.281 81.122,11.802 81.122,14.547 87.642,21.067 v1(87.642,23.713)
GPIO2: IC14.7 J3.7 | length 34
  Top Layer w0.2: 87.025,35.25 87.063,35.213 87.063,17.988 v1(87.1,17.95)
  Bottom Layer w0.2: v1(82.205,4.7) 81.8,5.105 81.8,14.375 85.375,17.95 v1(87.1,17.95)
GPIO3: IC14.6 J3.8 | length 33.5
  Top Layer w0.2: 86.525,35.25 86.52,35.245 86.52,17.205 v1(86.575,17.15)
  Bottom Layer w0.2: v1(83.5,4.783) 83.5,5.575 82.275,6.8 82.275,14 82.3,14 85.45,17.15 v1(86.575,17.15)
GPIO4: IC14.5 J3.9 | length 33.2
  Top Layer w0.2: 86.025,35.25 85.995,35.22 85.995,16.436 86.075,16.356 v1(86.075,16.275)
  Bottom Layer w0.2: v1(84.745,4.7) 84.745,5.405 82.825,7.325 82.825,13.875 84.78,15.83 85.63,15.83 v1(86.075,16.275)
GPIO5: IC14.4 J3.10 | length 33
  Top Layer w0.2: 85.525,35.25 85.495,35.22 85.495,15.441 85.605,15.331 v1(85.605,15.25)
  Bottom Layer w0.2: v1(85.605,15.25) 84.925,15.25 83.35,13.675 83.35,7.85 85.958,5.242 85.958,4.757 v1(86.015,4.7)
IO0: IC1.27 J5.6 | length 35.4
  Top Layer w0.2: 68.4,4.366 68.4,2.975 v1(68.9,2.475) ; v1(70.275,3.725) 71.25,3.725 71.675,3.3 88.275,3.3 89.05,4.075 IC1.27 89.35,5.95 90.275,5.025 97.04,5.025 98.4,6.385
  Bottom Layer w0.2: v1(68.9,2.475) 68.981,2.475 69.108,2.601 69.151,2.601 v1(70.275,3.725)
M1A: IC1.16 J7.5
M1B: IC1.22 J7.4
M2A: IC1.23 J6.5
M2B: IC1.26 J6.4
M_CURR_1: IC2.7 IC13.1
M_CURR_2: IC2.6 IC12.1
NetAC1_12: AC1.12 R21.1
NetC15_1: C15.1 R9.1 | length 1.2
  Top Layer w0.3: R9.1 47.358,25.942 47.358,26.942 C15.1
NetC15_2: C15.2 IC8.5 L1.1
NetC19_1: C19.1 IC8.7 | length 2.2
  Top Layer w0.3: C19.1 46,24.698 46.85,23.848 IC8.7
NetCon4_1: Con4.1 Q1.1 Q1.2 Q1.3 R1.2 S1.1 S1.4
NetD1_2: D1.2 R12.2 | length 1.6
  Top Layer w0.2: R12.2 32.437,17.225 D1.2
NetD2_2: D2.2 R13.2 | length 1.5
  Top Layer w0.2: R13.2 32.387,15.275 D2.2
NetD5_2: D5.2 IC7.2 J4.A9
NetD6_2: D6.2 IC6.2 J4.A4
NetD7_2: D7.2 R17.2
NetD10_2: D10.2 IC9.2 J1.1
NetIC2_2: IC2.2 R16.1
NetIC3_6: IC3.6 J6.1 | length 3.7
  Top Layer w0.5: IC3.6 125.24,56.14 125.575,56.475 126.075,56.475
NetIC3_7: IC3.7 R7.1 | length 5
  Bottom Layer w0.5: v1(122.456,57.37) 123.895,57.37 124.202,57.677 v2(124.202,60.775)
NetIC3_8: IC3.8 J6.2 | length 3.7
  Top Layer w0.5: IC3.8 125.37,58.68 125.575,58.475 126.075,58.475
NetIC4_6: IC4.6 J7.1 | length 4
  Top Layer w0.5: 96.15,60.6 96.15,60.1 96.385,59.865 IC4.6
NetIC4_7: IC4.7 R8.1 | length 5.1
  Bottom Layer w0.5: v2(91.75,58.627) 94.848,58.627 95.125,58.35 95.125,56.775 v1(95.1,56.75)
NetIC4_8: IC4.8 J7.2 | length 4
  Top Layer w0.5: IC4.8 93.845,59.795 94.15,60.1 94.15,60.6
NetIC8_6: IC8.6 R9.2 | length 1.9
  Top Layer w0.3: R9.2 47.35,24.666 IC8.6
NetIC8_8: IC8.8 R10.2 R11.2
NetIC10_12: IC10.12 R19.1
NetIC11_12: IC11.12 R20.1
NetIC12_3: IC12.3 R7.2 R22.1
NetIC13_3: IC13.3 R8.2 R23.1
NetIC14_2: IC14.2 R24.1
NetJ4_A5: J4.A5 R6.2
NetJ4_B5: J4.B5 R18.2
NetQ1_4: Q1.4 R1.1
NetR3_2: R3.2 S1.2 S1.5
PWM3: IC1.32 IC4.2 | length 26.9
  Top Layer w0.2: IC1.32 90.3,12.3 90.575,12.575 v1(90.575,17.475) ; v1(90.517,26.743) 94.51,30.735 ; 111.685,57.41 117.063,57.41
  Bottom Layer w0.2: v1(90.517,26.743) 90.517,17.533 v1(90.575,17.475)
PWM4: IC1.33 IC4.3 | length 25.7
  Top Layer w0.2: IC1.33 88.98,13.5 87.797,13.5 87.68,13.617 87.68,18.19 87.675,18.195 87.675,22.925 94.215,29.465 ; 111.39,56.14 117.063,56.14
PWM5: IC1.34 IC3.2 | length 113.3
  Top Layer w0.2: v1(56.725,28.625) 56.75,28.6 69.125,28.6 74.15,23.575 74.15,7.7 73.75,7.3 v1(73.525,7.3)
  Bottom Layer w0.2: 33.775,19.525 42.956,28.706 56.458,28.706 56.482,28.682 56.668,28.682 v1(56.725,28.625) ; v1(73.525,7.3) 72.45,6.225 72.45,2.775 72.9,2.325 90.1,2.325 90.983,3.208 90.983,14.617 90.76,14.84 v1(89.05,14.84) ; v2(95.125,51.175) 95.875,51.925 107.625,51.925
PWM6: IC1.35 IC3.3 | length 115.4
  Top Layer w0.2: v1(54.975,27.95) 68.375,27.95 73.35,22.975 v1(73.35,8.45)
  Bottom Layer w0.2: 34,18.8 43.15,27.95 v1(54.975,27.95) ; v1(73.35,8.45) 72.075,8.45 71.825,8.2 71.825,2.284 72.409,1.7 90.825,1.7 91.875,2.75 91.875,15.7 91.461,16.114 89.064,16.114 v1(89.05,16.1) ; v2(96.425,51.2) 107.85,51.2
RXD0: IC1.37 J5.5 | length 15.8
  Top Layer w0.2: IC1.37 90.22,18.65 90.815,18.055 92.656,16.215 92.656,9.589 95.86,6.385
SCL: AC1.13 IC1.39 IC2.10 IC10.13 IC11.13 IC14.10 R15.1 | length 12
  Top Layer w0.2: IC1.39 90.64,21.19 93.225,23.775 v1(94.2,23.775) ; AC1.13 97.4,22.466 97.683,22.748 97.7,22.748 97.9,22.948 v2@97.9,22.966
  Bottom Layer w0.2: v1(94.2,23.775) 94.2,23.694 94.54,23.354 94.54,23.11 94.7,22.95 v2(97.95,22.95)
SDA: AC1.14 IC1.38 IC2.9 IC10.14 IC11.14 IC14.9 R14.1 | length 10.3
  Top Layer w0.2: IC1.38 90.645,19.92 93.716,22.991 96.7,22.991 96.9,22.791 AC1.14
TXD0: IC1.36 J5.3 | length 13.6
  Top Layer w0.2: v1(93.025,17.125) 93.025,11.76 95.86,8.925
  Bottom Layer w0.2: v1(89.075,17.375) 89.555,16.895 92.758,16.895 92.988,17.125 v1(93.025,17.125)
USB_D+: D3.2 D9.2 IC1.14 J1.3 J4.A6 J4.B6 | length 45.6
  Top Layer w0.2: v1(70.975,1.775) 71.25,1.5 107.65,1.5 107.975,1.825 107.975,4.25 107.6,4.625 107.6,5.79
  Bottom Layer w0.2: v1(70.975,1.775) 70.975,5.669 71.175,5.869 v1(71.175,5.95)
USB_D-: D4.2 D8.2 IC1.13 J1.2 J4.A7 J4.B7 | length 45.4
  Top Layer w0.2: IC1.13 69.87,7.22 69.425,6.775 69.425,3.4 70.25,2.575 98.1,2.575 100,4.475 106.6,4.475 106.95,4.825 106.95,5.79
pads on no net: AC1.1 AC1.2 AC1.3 AC1.4 AC1.9 AC1.10 AC1.11 Con4.0 IC1.24 IC1.25 IC1.28 IC1.29 IC1.30 IC1.31 IC5.4 IC8.1 IC8.2 IC10.1 IC10.2 IC10.3 IC10.4 IC10.9 IC10.10 IC10.11 IC11.1 IC11.2 IC11.3 IC11.4 IC11.9 IC11.10 IC11.11 J1.4 J2.MP1 J2.MP2 J3.11 J3.12 J3.MP1 J3.MP2 J4.A8 J4.B8 J6.7 J6.8 J7.7 J7.8 S1.3 S1.6
copper on no net: | length 689.8
  Top Layer w0.2: 58.237,34.365 63.135,34.365 67.725,29.775 68.325,29.775 v1(68.375,29.725) ; 58.237,35.635 63.49,35.635 v1(68.325,30.8) ; 64.15,2.95 64.15,7.1 64.283,6.967 64.658,6.967 65.8,5.825 66.35,5.825 66.35,4.709 66.375,4.684 66.934,4.684 67.784,5.534 68.4,5.534 ; 66.475,13.45 66.475,17.6 67.051,17.6 67.651,17 68.564,17 ; 67.05,19.65 68.175,19.65 68.591,19.234 68.591,18.325 68.591,17.009 68.582,17 ; v1(80.1,29.025) 80.1,28.3 81.9,26.5 81.9,23.25 81.9,12.8 84.99,9.71 v1(85.521,9.71) ; v1(81.175,29.067) 83,27.242 83,13.2 v1(85.575,10.625) ; 84.025,35.25 84.025,13.215 88.75,8.49 89.05,8.49 ; 84.525,35.25 84.565,35.21 84.565,13.565 v1(84.605,13.525) ; 85.025,35.25 85.025,14.631 85.15,14.506 v1(85.15,14.425)
  Top Layer w0.254: 0,0 150,0 150,35 118,35 112.225,40.775 112.175,40.775 37.8,40.775 37.775,40.775 32,35 0,35 0,0
  Top Layer w0.3: 106.2,5.79 106.2,7.838
  Top Layer w0.5: 51.175,51.025 51.192,51.042 54.445,51.042 54.463,51.06 ; 52.748,46.425 52.748,49.373 53.165,49.79 54.463,49.79
  Bottom Layer w0.2: v1(68.325,30.8) 80.075,30.8 81.175,29.7 v1(81.175,29.067) ; v1(68.375,29.725) 79.993,29.725 80.11,29.608 80.11,29.035 v1(80.1,29.025) ; v1(84.605,13.525) 84.605,8.345 85.73,7.22 v1(89.05,7.22) ; v1(85.15,14.425) 85.093,14.368 84.627,14.368 83.975,13.715 83.975,8 85.325,6.65 85.335,6.65 v1(87.285,4.7) ; v1(85.521,9.71) 89.033,9.71 v1(89.045,9.722) ; v1(85.575,10.625) 85.98,11.03 v1(89.05,11.03)
  Bottom Layer w0.3: v1(42.65,15.775) 41.425,17 41.425,22.167 40.299,23.293 40.299,23.599 41.575,24.875 46.828,24.875 51.453,20.25 57.142,20.25 57.414,20.522 57.414,25.089 64.925,32.6 87.675,32.6 89.6,30.675 ; 106.775,57.35 117.98,57.35 122.12,53.211 v1(123.011,53.211)
  Bottom Layer w0.5: v2(51.175,49.025) 52.975,49.025 53.5,48.5 v1(54.5,48.5)
  other v2: 106.6,3.05 109.15,3.1 110.475,6.15

## Polygon pours and split planes (outlines as drawn)
12V on Top Layer "12V_L01_P010" (solid, pour order 10): 121.512,55.287 121.6,55.375 123.525,55.375 123.625,55.275 123.625,54.5 123.9,54.225 124.675,54.225 124.8,54.1 124.8,52.875 124.625,52.7 123.85,52.7 123.775,52.625 123.775,51.65 123.625,51.5 121.675,51.5 121.512,51.65
12V on Top Layer "12V_L01_P001" (solid, pour order 1): 42.4,17.4 42.7,17.4 45.99,20.49 45.99,20.492 45.992,20.492 46.1,20.6 47,20.6 47.1,20.7 47.1,21.5 47.2,21.6 47.5,21.6 47.575,21.525 47.575,14.075 47.2,13.7 42.8,13.7 42.8,10.7 42.3,10.3 38.4,10.3 38.1,10.6 38.1,16.6 38.9,17.4 42.1,17.4
12V on Top Layer "12V_L01_P009" (solid, pour order 9): 97.125,55.85 97.125,57.625 97.425,57.925 97.7,57.925 97.775,58 97.775,58.775 97.95,58.95 98.775,58.95 98.975,58.75 98.975,57.9 99.025,57.85 100.75,57.85 100.9,57.7 100.9,55.8 100.85,55.75 97.225,55.75
3.3V on Top Layer "3.3V_L01_P004" (solid, pour order 4): 54,26.2 54.3,26.5 57.1,26.5 57.3,26.3 57.3,15.1 57,14.8 55.9,14.8 55.7,14.6 55.7,13.9 55.6,13.8 54.2,13.8 54,14
5V on Top Layer "5V_L01_P006" (solid, pour order 6): 104.65,12.775 104.825,12.95 106.55,12.95 106.7,12.8 106.7,9.2 106.65,9.15 102.925,9.15 102.875,9.2 102.875,10.75 103.125,11 104.25,11 104.65,11.4 104.65,11.875 104.65,11.4 104.65,11.875
GND on Top Layer "GND_L01_P005" (solid, pour order 5): 52.5,6.8 52.5,5.7 52.7,5.5 57.325,5.5 57.9,6.075 57.9,10.497 55.197,13.2 54,13.2 53.7,13.7 53.7,13.9 53.7,20.8 53.1,21.4 50.6,21.4 50.425,21.575 47.65,21.575 47.65,20.747 47.725,20.672 47.725,13.6 49.4,13.6 51.975,11.025 53.8,11.025 56.1,8.725 56.1,7.2 55.7,6.8
NetC15_2 on Top Layer "NETC15_2_L01_P003" (solid, pour order 3): 47.7,22.4 51,22.4 51.1,22.5 51.1,26.5 51,26.6 49.5,26.6 49.3,26.8 49.3,27.4 49.2,27.5 48.1,27.5 48,27.4 48,23.669 47.7,23.369 47.7,23.3
NetIC8_8 on Top Layer "NETIC8_8_L01_P002" (solid, pour order 2): 45.7,21.5 44.7,21.5 44.6,21.6 44.6,23.7 44.8,23.9 45.6,23.9 46.1,23.4 46.5,23.4 46.6,23.3 46.6,22.5 46.5,22.4 45.9,22.4 45.9,21.7

## Silkscreen, mask and mechanical layers (free items; w line width, h text height)
Top Overlay:
  text "EN" at 62.125,16.1 h1.4
  text "IO0" at 59.6,4.563 h1.4